# Altium PCB JTAG_connector3.PcbDoc
Units mil, origin at the board's own origin, x right, y up, seen from the top; angles counter-clockwise.
Board outline 1000 x 2000 mil, 2 copper layers (Top Layer, Bottom Layer); 4 components, 8 nets, 24 pads, 8 vias.
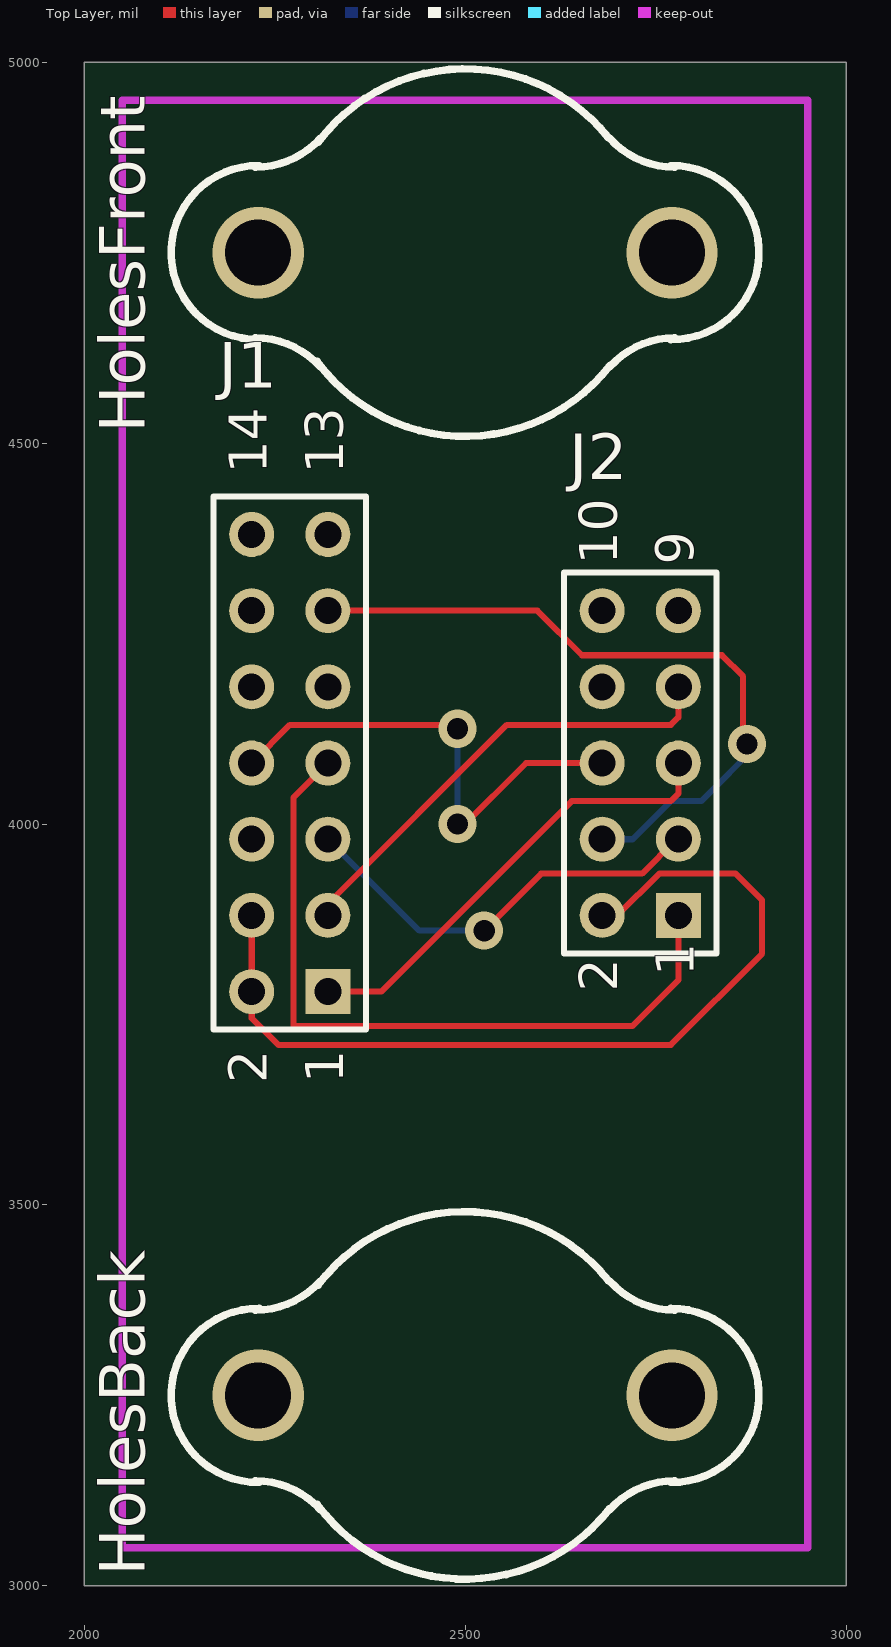
[diagram p0: Top Layer view]
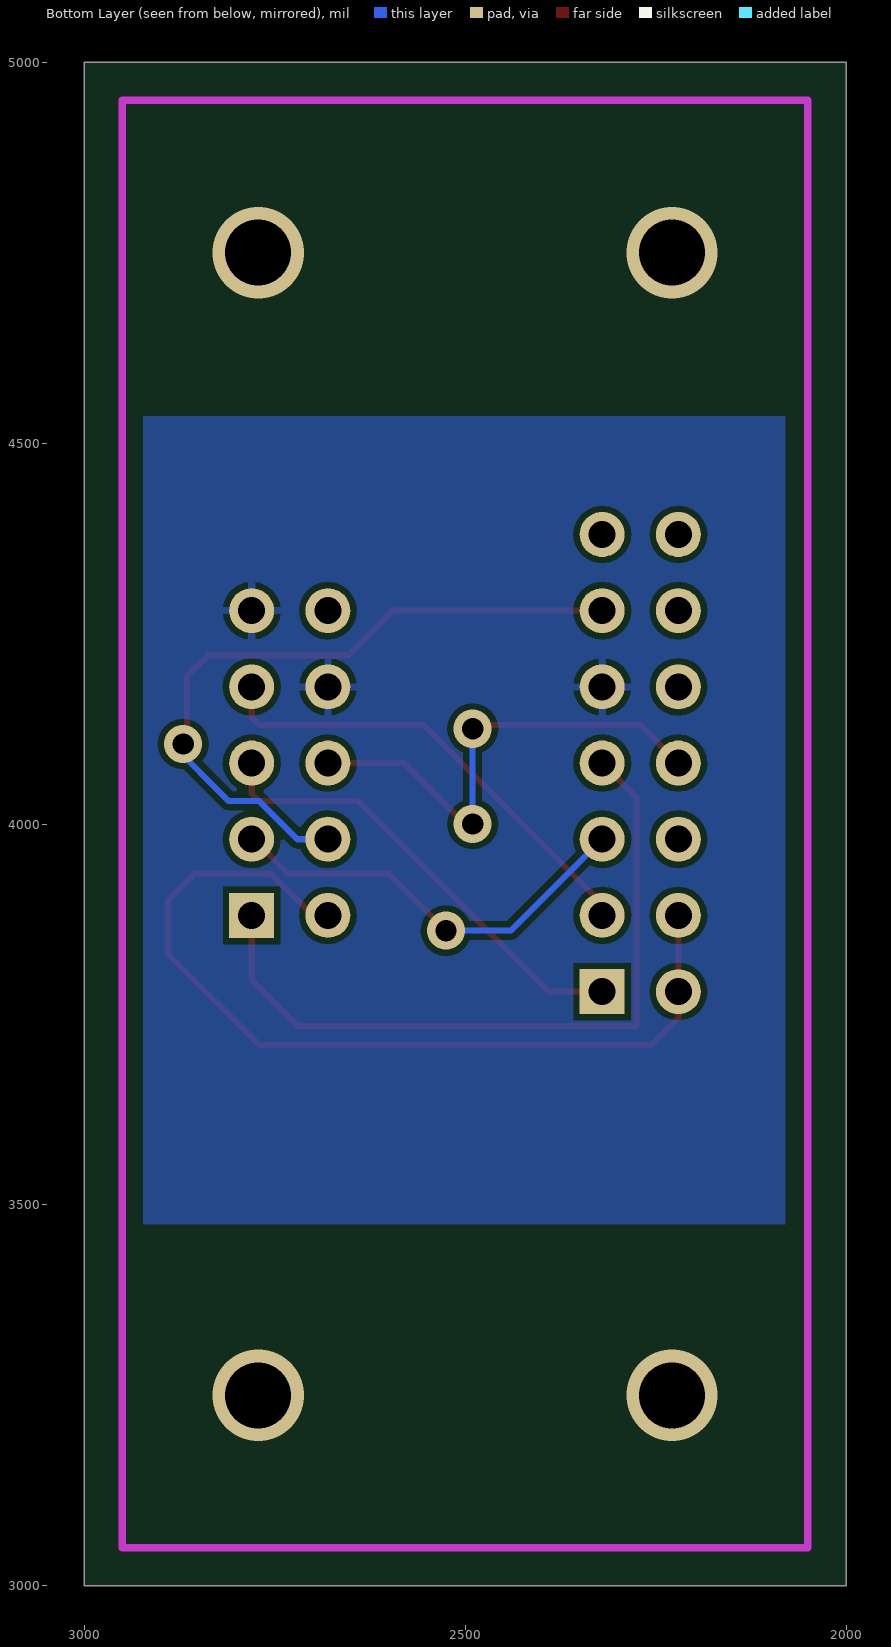
[diagram p1: Bottom Layer view, seen from below]

## Layer stack, top to bottom
Top Layer: signal copper 1.4
Dielectric: dielectric 12.6, FR-4, Dk 4.8
Bottom Layer: signal copper 1.4

## Board outline
2000,3000 3000,3000 3000,5000 2000,5000

## Design rules (kind name [scope] priority, off if disabled: settings)
Clearance [All] p1: gap=8
PolygonConnect [All] p1: connectstyle=Relief reliefconductorwidth=10 reliefentries=4 polygonreliefangle="90 Angle"
RoutingVias [All] p1: holewidth=25 width=40 viastyle="Through Hole" minholewidth=28 minwidth=50 maxholewidth=28 maxwidth=50
SilkscreenOverComponentPads [All] p1: minsilkscreentomaskgap=10
SolderMaskExpansion [All] p1: expansion=4
Width [All] p1: maxlimit=8 minlimit=8 preferedwidth=8
27 further rules are at their usual default settings.

## Components (designator, comment, footprint, x,y, rotation, side; value= is the part's Value field where it differs from the comment)
HolesBack "non connect" "3/8\"Caster" 2500,3250 r180 top
HolesFront "non connect" "3/8\"Caster" 2500,4750 r180 top
J1 "Debugger header" HDR2X7 2320,3780 r90 top
J2 "JTAG" HDR2X5 2780,3880 r90 top

## Footprints (in the part's own frame and the unit in brackets; to place one, negate y for a bottom-side part, rotate by r counter-clockwise, add the part's x,y. Pads: shape width x height; smd on the part's side, far side on the other; paste and mask are expansions set on the pad)
"3/8\"Caster" [mil] "3/8\" caster for board"
  silkscreen extent -386,-241 386,241
HDR2X5 [mm] "Connector; Header; 5x2 Position"
  rect 1.5x1.5 hole 0.9: 1(0,0)
  round 1.5 hole 0.9: 2(0,2.54) 3(2.54,0) 4(2.54,2.54) 5(5.08,0) 6(5.08,2.54) 7(7.62,0) 8(7.62,2.54) 9(10.16,0) 10(10.16,2.54)
  silkscreen extent -1.27,-1.27 11.43,3.81
HDR2X7 [mm] "Connector; Header; 7x2 Position"
  rect 1.5x1.5 hole 0.9: 1(0,0)
  round 1.5 hole 0.9: 2(0,2.54) 3(2.54,0) 4(2.54,2.54) 5(5.08,0) 6(5.08,2.54) 7(7.62,0) 8(7.62,2.54) 9(10.16,0) 10(10.16,2.54) 11(12.7,0) 12(12.7,2.54) 13(15.24,0) 14(15.24,2.54)
  silkscreen extent -1.27,-1.27 16.51,3.81

## Part data
HolesBack HolesFront: library part Caster, "This is just a space saver to get the caster onto the pcb"
J1: library part "Header 7X2", "Header, 7-Pin, Dual row"
J2: library part "Header 5X2", "Header, 5-Pin, Dual row"

## Via types
v1: diameter 50, hole 28, Top Layer to Bottom Layer, 4 vias
v2: diameter 120, hole 86.61, Top Layer to Bottom Layer, 4 vias

## Nets (pads, with @x,y where several pads share a name; then routed paths per layer and width w, separated by ;. In a path a pad name is that pad's centre, name@x,y a point inside that pad or via, vN(x,y) a via of type N, cw(c..) or ccw(c..) an arc to the next point about the centre after c; other vN are vias at no path point)
3.3V: J1.2 J1.4 J2.2 | length 1186.5
  Top Layer w8: J1.4 J1.2 2220,3745 2255,3710 2770,3710 2890,3830 2890,3900 2855,3935 2755,3935 2700,3880 J2.2
GND: J1.9 J2.8 J2.9
RESET: J1.11 J2.4 | length 934.5
  Top Layer w8: J1.11 2595,4280 2653.47,4221.53 2837.2,4221.53 2865,4193.73 2865,4125 v1@2885,4105
  Bottom Layer w8: J2.4 2720,3980 2770,4030 2810,4030 v1@2885,4105
  other v1: 2870,4105
TCK: J1.7 J2.1 | length 978.5
  Top Layer w8: J1.7 2275,4035 2275,3735 2720,3735 2780,3795 J2.1
TDI: J1.3 J2.7 | length 616.5
  Top Layer w8: J1.3 2320,3895 2555,4130 2770,4130 2780,4140 J2.7
TDO: J1.1 J2.5 | length 607.7
  Top Layer w8: J1.1 2390,3780 2640,4030 2770,4030 2780,4040 J2.5
TEST: J1.8 J2.6 | length 645.1
  Top Layer w8: J1.8 2270,4130 2485,4130 v1(2490,4125) ; v1@2495,3995 2580,4080 J2.6
  Bottom Layer w8: v1(2490,4125) v1(2490,4000) v1@2495,3995
TMS: J1.5 J2.3 | length 564.4
  Top Layer w8: v1(2525,3860) 2600,3935 2732.37,3935 2777.37,3980 J2.3@2785,3980
  Bottom Layer w8: J1.5 2440,3860 v1(2525,3860)
pads on no net: J1.6 J1.10 J1.12 J1.13 J1.14 J2.10
copper on no net:
  other v2: 2228.35,3250 2771.65,3250 2228.35,4750 2771.65,4750

## Polygon pours and split planes (outlines as drawn)
GND on Bottom Layer "Gnd Plane" (solid, remove dead copper, pour order 1000): 2080,3475 2922.5,3475 2922.5,4535 2080,4535

## Keep-outs
Keep-Out Layer:
  lines w10: 2050,3050 2050,4950 2950,4950 2950,3050 2050,3050

## Dimensions
2050,3050 to 2050,4950 on Mechanical 1
2050,3050 to 2950,3050 on Mechanical 1

## Text inside footprints (layer, text, board x,y; h text height)
J1: Top Overlay "2" at 2240,3660 h50 r90; Top Overlay "1" at 2340,3660 h50 r90; Top Overlay "14" at 2240,4460 h50 r90; Top Overlay "13" at 2340,4460 h50 r90
J2: Top Overlay "10" at 2700,4340 h50 r90; Top Overlay "9" at 2800,4340 h50 r90; Top Overlay "1" at 2800,3800 h50 r90; Top Overlay "2" at 2700,3780 h50 r90